# EAGLE board Spartan2Bone (EAGLE 8.0.1)
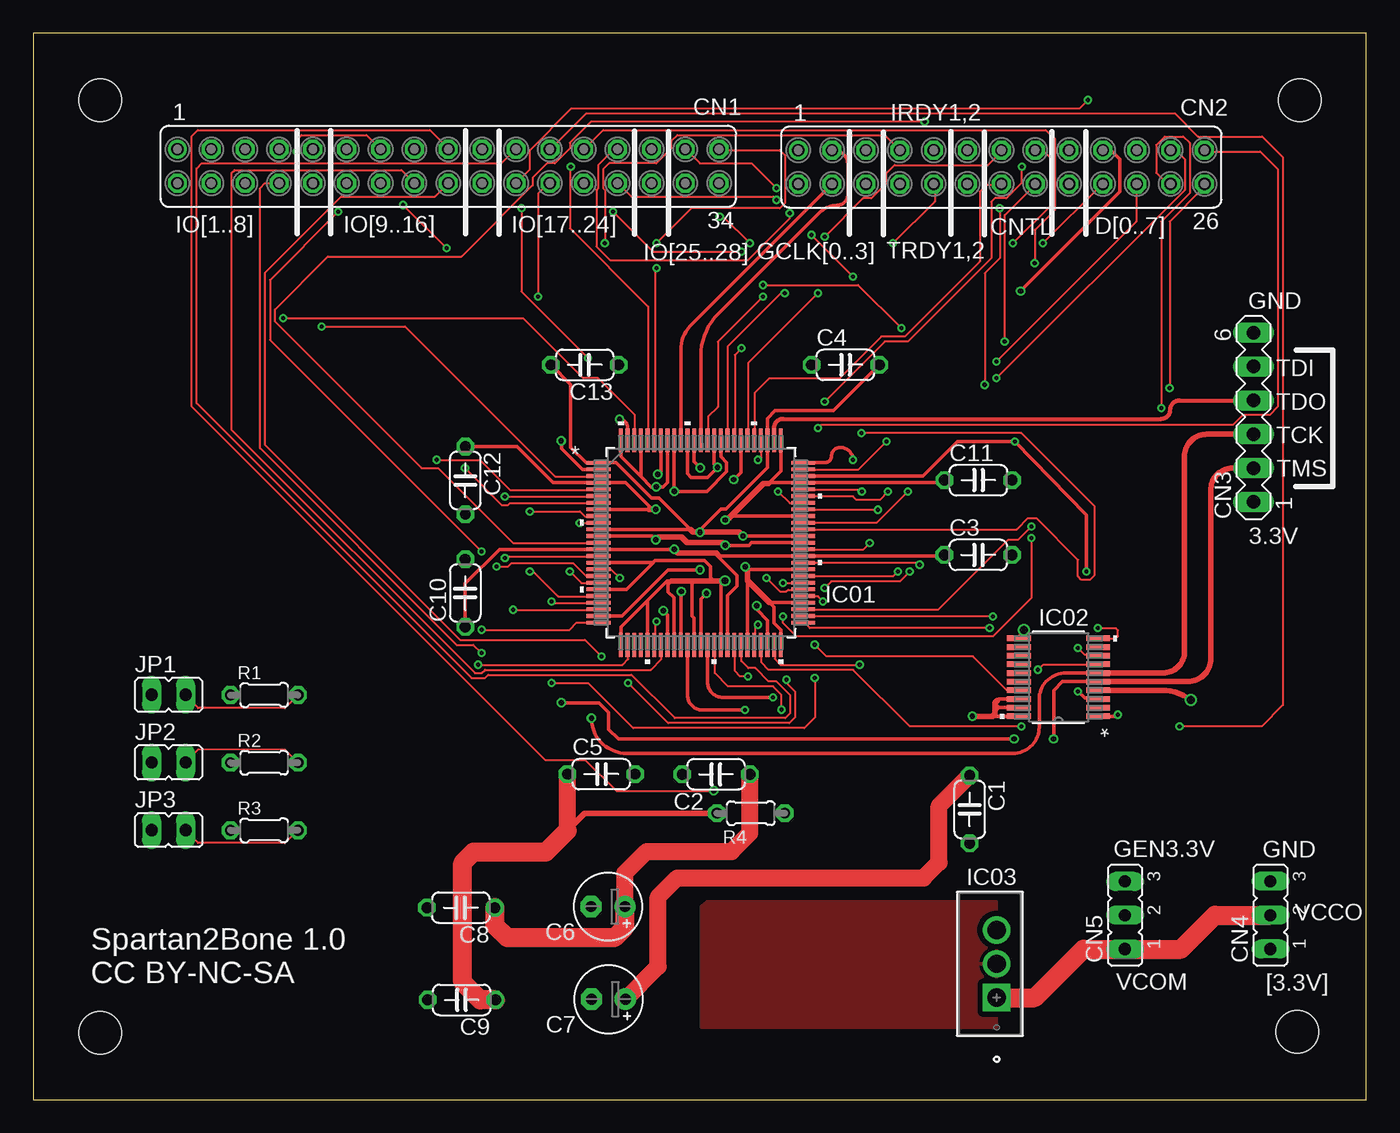
[diagram p0: board, top side]
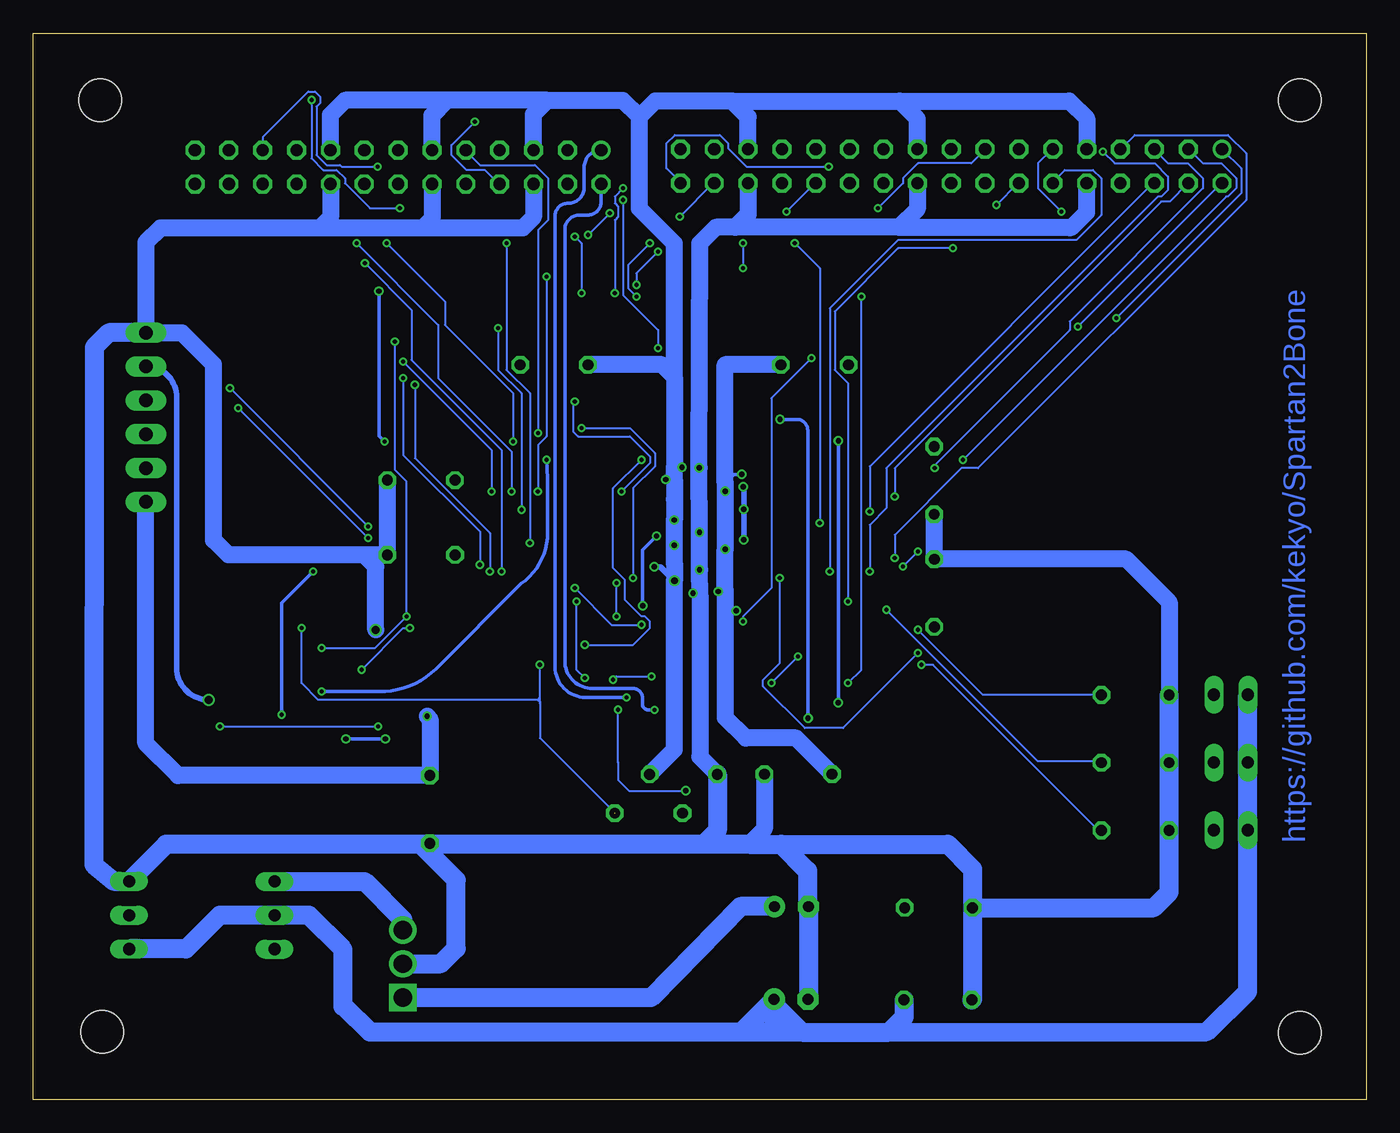
[diagram p1: board, bottom side, seen from below]

Size 100 x 80 mm. Coordinates in mm from the lower left corner, seen from the top.
Outline: 0,0 100,0 100,80 0,80 0,0
Copper layers (1*16): Top 0.035mm / dielectric 1.5mm / Bottom 0.035mm
Design rules "SeeedStudio_2layer_DRU_no_angle_20140221 *": minimum track width 6mil, minimum drill 12mil, track to track 8mil, track to pad 8mil, pad to pad 8mil, via to via 8mil, smd to smd 0mil, copper to edge 50mil, drill to drill 10mil, minimum pad ring 10mil, minimum via ring 6mil, stop-mask expansion 2mil, vias tented up to drill 100mil, thermal gap 10mil
Holes 3.2 mm at 5,75 95,75 5,5 94.85,5.08

## Footprints (pad centres in the part's own frame; a part is rotated, then mirrored left to right if it is on the bottom)
C050-024X044 = drill 0.813 octagon: 1 -2.54,0; 2 2.54,0
E2,5-5 = drill 0.813 pad 1.6: + -1.27,0 | drill 0.813 pad 1.6 octagon: - 1.27,0
FE17-2 = drill 0.914: 1 -20.32,1.27 | drill 0.914 octagon: 2 -20.32,-1.27; 3 -17.78,1.27; 4 -17.78,-1.27; 5 -15.24,1.27; 6 -15.24,-1.27; 7 -12.7,1.27; 8 -12.7,-1.27; 9 -10.16,1.27; 10 -10.16,-1.27; 11 -7.62,1.27; 12 -7.62,-1.27; 13 -5.08,1.27; 14 -5.08,-1.27; 15 -2.54,1.27; 16 -2.54,-1.27; 17 0,1.27; 18 0,-1.27; 19 2.54,1.27; 20 2.54,-1.27; 21 5.08,1.27; 22 5.08,-1.27; 23 7.62,1.27; 24 7.62,-1.27; 25 10.16,1.27; 26 10.16,-1.27; 27 12.7,1.27; 28 12.7,-1.27; 29 15.24,1.27; 30 15.24,-1.27; 31 17.78,1.27; 32 17.78,-1.27; 33 20.32,1.27; 34 20.32,-1.27
FE13-2 = drill 0.914: 1 -15.24,1.27 | drill 0.914 octagon: 2 -15.24,-1.27; 3 -12.7,1.27; 4 -12.7,-1.27; 5 -10.16,1.27; 6 -10.16,-1.27; 7 -7.62,1.27; 8 -7.62,-1.27; 9 -5.08,1.27; 10 -5.08,-1.27; 11 -2.54,1.27; 12 -2.54,-1.27; 13 0,1.27; 14 0,-1.27; 15 2.54,1.27; 16 2.54,-1.27; 17 5.08,1.27; 18 5.08,-1.27; 19 7.62,1.27; 20 7.62,-1.27; 21 10.16,1.27; 22 10.16,-1.27; 23 12.7,1.27; 24 12.7,-1.27; 25 15.24,1.27; 26 15.24,-1.27
MA06-1 = drill 1.016 long: 1 -6.35,0; 2 -3.81,0; 3 -1.27,0; 4 1.27,0; 5 3.81,0; 6 6.35,0
JP2 = drill 0.914 long: 1 -2.54,0; 2 0,0; 3 2.54,0
100-VQFP-M = smd 1.778 x 0.279: 1 -7.671,6; 2 -7.671,5.5; 3 -7.671,5; 4 -7.671,4.5; 5 -7.671,4; 6 -7.671,3.5; 7 -7.671,3; 8 -7.671,2.5; 9 -7.671,2; 10 -7.671,1.5; 11 -7.671,1; 12 -7.671,0.5; 13 -7.671,0; 14 -7.671,-0.5; 15 -7.671,-1; 16 -7.671,-1.5; 17 -7.671,-2; 18 -7.671,-2.5; 19 -7.671,-3; 20 -7.671,-3.5; 21 -7.671,-4; 22 -7.671,-4.5; 23 -7.671,-5; 24 -7.671,-5.5; 25 -7.671,-6; 51 7.671,-6; 52 7.671,-5.5; 53 7.671,-5; 54 7.671,-4.5; 55 7.671,-4; 56 7.671,-3.5; 57 7.671,-3; 58 7.671,-2.5; 59 7.671,-2; 60 7.671,-1.5; 61 7.671,-1; 62 7.671,-0.5; 63 7.671,0; 64 7.671,0.5; 65 7.671,1; 66 7.671,1.5; 67 7.671,2; 68 7.671,2.5; 69 7.671,3; 70 7.671,3.5; 71 7.671,4; 72 7.671,4.5; 73 7.671,5; 74 7.671,5.5; 75 7.671,6 | smd 0.279 x 1.778: 26 -6,-7.671; 27 -5.5,-7.671; 28 -5,-7.671; 29 -4.5,-7.671; 30 -4,-7.671; 31 -3.5,-7.671; 32 -3,-7.671; 33 -2.5,-7.671; 34 -2,-7.671; 35 -1.5,-7.671; 36 -1,-7.671; 37 -0.5,-7.671; 38 0,-7.671; 39 0.5,-7.671; 40 1,-7.671; 41 1.5,-7.671; 42 2,-7.671; 43 2.5,-7.671; 44 3,-7.671; 45 3.5,-7.671; 46 4,-7.671; 47 4.5,-7.671; 48 5,-7.671; 49 5.5,-7.671; 50 6,-7.671; 76 6,7.671; 77 5.5,7.671; 78 5,7.671; 79 4.5,7.671; 80 4,7.671; 81 3.5,7.671; 82 3,7.671; 83 2.5,7.671; 84 2,7.671; 85 1.5,7.671; 86 1,7.671; 87 0.5,7.671; 88 0,7.671; 89 -0.5,7.671; 90 -1,7.671; 91 -1.5,7.671; 92 -2,7.671; 93 -2.5,7.671; 94 -3,7.671; 95 -3.5,7.671; 96 -4,7.671; 97 -4.5,7.671; 98 -5,7.671; 99 -5.5,7.671; 100 -6,7.671
20-TSSOP-M = smd 1.778 x 0.406: 1 -2.972,2.926; 2 -2.972,2.276; 3 -2.972,1.626; 4 -2.972,0.975; 5 -2.972,0.325; 6 -2.972,-0.325; 7 -2.972,-0.975; 8 -2.972,-1.626; 9 -2.972,-2.276; 10 -2.972,-2.926; 11 2.972,-2.926; 12 2.972,-2.276; 13 2.972,-1.626; 14 2.972,-0.975; 15 2.972,-0.325; 16 2.972,0.325; 17 2.972,0.975; 18 2.972,1.626; 19 2.972,2.276; 20 2.972,2.926
T03B = drill 1.372 pad 1.88 square: 1 -5.08,-1.016 | drill 1.372 pad 1.88: 2 -2.54,-1.016; 3 0,-1.016
JP1 = drill 0.914 long: 1 0,-1.27; 2 0,1.27
0204/5 = drill 0.813 octagon: 1 -2.54,0; 2 2.54,0

## Placement (x,y rotation side)
C1  0.01uF  [C050-024X044]  70.25,21.77 270 top
C2  0.01uF  [C050-024X044]  51.22,24.4 180 top
C3  0.01uF  [C050-024X044]  70.89,40.86 0 top
C4  0.01uF  [C050-024X044]  60.93,55.13 0 top
C5  0.01uF  [C050-024X044]  42.61,24.42 0 top
C6  100uF  [E2,5-5]  43.12,14.48 180 top
C7  100uF  [E2,5-5]  43.15,7.53 180 top
C8  0.1uF  [C050-024X044]  32.08,14.39 180 top
C9  0.1uF  [C050-024X044]  32.13,7.48 180 top
C10  0.01uF  [C050-024X044]  32.4,38 90 top
C11  0.01uF  [C050-024X044]  70.9,46.47 0 top
C12  0.01uF  [C050-024X044]  32.41,46.45 270 top
C13  0.01uF  [C050-024X044]  41.37,55.13 180 top
CN1  IO[1..28]  [FE17-2]  31.13,70.03 0 top
CN2  GCK RDY CNT D[0..7]  [FE13-2]  72.63,69.97 0 top
CN3  JTAG  [MA06-1]  91.55,51.19 90 top
CN4  POWER  [JP2]  92.81,13.83 90 top
CN5  PCONF  [JP2]  81.9,13.83 90 top
IC01  XC2S30-5VQG100C100-VQFP-M  [100-VQFP-M]  50.08,41.78 0 top
IC02  XCF01SVOG20C20-TSSOP-M  [20-TSSOP-M]  76.92,31.68 180 top
IC03  LM2937ET-3.3/NOPB  [T03B]  71.26,12.72 90 top
JP1  MODE0  [JP1]  10.15,30.37 270 top
JP2  MODE1  [JP1]  10.15,25.29 270 top
JP3  MODE2  [JP1]  10.15,20.21 270 top
R1  4.7k  [0204/5]  17.32,30.35 0 top
R2  4.7k  [0204/5]  17.32,25.27 0 top
R3  4.7k  [0204/5]  17.32,20.19 0 top
R4  4.7k  [0204/5]  53.83,21.48 0 top

## Library data of the parts
C1-C13 R1-R4 = resistor
CN1 CN2 = con-lsta; OC_FARNELL: unknown; OC_NEWARK: unknown
CN3 = con-lstb; OC_FARNELL: unknown; OC_NEWARK: unknown
CN4 CN5 JP1-JP3 = jumper
IC01 = Spartan2Bone; MANUFACTURER_PART_NUMBER: XC2S305VQG100C; VENDOR: Xilinx Inc
IC02 = Spartan2Bone; MANUFACTURER_PART_NUMBER: XCF01SVOG20C; VENDOR: Xilinx Inc
IC03 = Spartan2Bone; MANUFACTURER_PART_NUMBER: lm2937et3_3nopb; VENDOR: National Semiconductor

## Nets
BUSY: CN2.15 IC01.74
CCLK: IC01.75 IC02.3
CS: CN2.14 IC01.80
D0: CN2.19 IC01.73 IC02.1
D1: CN2.20 IC01.70
D2: CN2.21 IC01.69
D3: CN2.22 IC01.66
D4: CN2.23 IC01.60
D5: CN2.24 IC01.57
D6: CN2.25 IC01.56
D7: CN2.26 IC01.53
DONE: IC01.49 IC02.10 R4.2
GND: C1.2 C2.2 C3.2 C4.2 C5.2 C6.- C7.- C8.2 C9.2 C10.2 C11.2 C12.2 C13.2 CN1.10 CN1.20 CN1.30 CN2.6 CN2.12 CN2.18 CN3.6 CN4.3 IC01.1 IC01.11 IC01.24 IC01.38 IC01.48 IC01.64 IC01.78 IC01.89 IC02.11 IC03.2 R1.1 R2.1 R3.1
I_GCK0: CN2.1 IC01.39
I_GCK1: CN2.2 IC01.36
I_GCK2: CN2.3 IC01.88
I_GCK3: CN2.4 IC01.91
INIT: CN2.16 IC01.52 IC02.8
IO1: CN1.1 IC01.98
IO2: CN1.2 IC01.3
IO3: CN1.3 IC01.5
IO4: CN1.4 IC01.6
IO5: CN1.5 IC01.7
IO6: CN1.6 IC01.9
IO7: CN1.7 IC01.15
IO8: CN1.8 IC01.17
IO9: CN1.11 IC01.18
IO10: CN1.12 IC01.19
IO11: CN1.13 IC01.21
IO12: CN1.14 IC01.22
IO13: CN1.15 IC01.31
IO14: CN1.16 IC01.32
IO15: CN1.17 IC01.40
IO16: CN1.18 IC01.43
IO17: CN1.21 IC01.44
IO18: CN1.22 IC01.46
IO19: CN1.23 IC01.47
IO20: CN1.24 IC01.55
IO21: CN1.25 IC01.58
IO22: CN1.26 IC01.68
IO23: CN1.27 IC01.71
IO24: CN1.28 IC01.83
IO25: CN1.31 IC01.84
IO26: CN1.32 IC01.87
IO27: CN1.33 IC01.95
IO28: CN1.34 IC01.96
IRDY: CN2.7 IC01.10
IRDY2: CN2.9 IC01.65
M0: IC01.25 JP1.2 R1.2
M1: IC01.23 JP2.2 R2.2
M2: IC01.27 JP3.2 R3.2
PROG: IC01.51 IC02.7
REG33: CN5.3 IC03.3
TCK: CN3.3 IC01.99 IC02.6
TDI: CN3.5 IC02.4
TDO: CN3.4 IC01.77
TDOTDI: IC01.79 IC02.17
TMS: CN3.2 IC01.2 IC02.5
TRDY: CN2.8 IC01.13
TRDY2: CN2.10 IC01.62
VCCINT: C1.1 C3.1 C5.1 C7.+ C9.1 C10.1 C13.1 CN3.1 CN4.1 CN5.2 IC01.14 IC01.33 IC01.35 IC01.42 IC01.61 IC01.85 IC01.92 IC01.94 IC02.18 IC02.19 IC02.20 JP1.1 JP2.1 JP3.1 R4.1
VCCO: C2.1 C4.1 C6.+ C8.1 C11.1 C12.1 CN1.9 CN1.19 CN1.29 CN2.5 CN2.11 CN2.17 CN4.2 CN5.1 IC01.4 IC01.8 IC01.12 IC01.16 IC01.20 IC01.26 IC01.30 IC01.34 IC01.37 IC01.41 IC01.45 IC01.50 IC01.54 IC01.59 IC01.63 IC01.67 IC01.72 IC01.76 IC01.82 IC01.86 IC01.90 IC01.93 IC01.97 IC01.100 IC03.1
WRITE: CN2.13 IC01.81

## Tracks (layer width: path | path; a pad name or v marks a point on that pad's centre or on a via)
BUSY  (via drill 0.3)
  Top 0.152: v64,49.38 61.88,47.25 57.88,47.25 IC01.74 | v73.5,64.25 76.25,67 76.25,70.71 75.73,71.24 CN2.15
  Bottom 0.152: v64,49.38 64,53 69.12,58.12 69.12,59.88 v73.5,64.25
CCLK  (via drill 0.3)
  Top 0.152: 79.4,30.12 79.88,30.12 IC02.3
  Top 0.254: IC01.75 59.37,47.78 arc90 59.89,48.31 arc-90 60.5,48.92 60.58,48.92 arc-90 v61.5,48 | v78.38,30.62 78.88,30.12 79.4,30.12
  Bottom 0.254: v78.38,30.62 78.37,30.63 73.61,30.63 arc-43 69.8,32.31 63.4,38.71 arc-55 61.42,42.52 61.42,45.92 arc-5 v61.5,48
CS
  Top 0.152: IC01.80 54.12,49.5 54.12,53.03 55.22,54.12 60.5,54.12 63.62,57.25 65.38,57.25 71,62.88 71,68.12 71.5,68.62 72.62,68.62 CN2.14
D0  (via drill 0.3, 0.4)
  Top 0.254: IC01.73 66.75,46.78 69.34,49.38 v73.65,49.38 79,43.88 v79,39.62 | v81.38,28.88 81.25,28.75 IC02.1 | 80.73,71.24 CN2.19 80.86,71.24 81.53,70.56 81.53,68.12 v74.07,60.66
  Bottom 0.254: v79,39.62 81.38,37.25 v81.38,28.88 | v73.65,49.38 74.07,49.79 v74.07,60.66
D1  (via drill 0.3)
  Top 0.152: v64.12,45.62 63.5,45 61.75,45 61.5,45.25 57.88,45.25 IC01.70 | v75.75,64.25 80.12,68.62 CN2.20
  Bottom 0.152: v64.12,45.62 64.12,48.62 69.62,54.12 69.62,58.12 v75.75,64.25
D2  (via drill 0.3)
  Top 0.152: v55.88,45.62 56.75,44.75 57.75,44.75 IC01.69 | v59.38,52.38 63.88,56.88 65.62,56.88 71.88,63.12 71.88,67.36 72.14,67.62 73,67.62 74.12,68.75 74.12,70 v74.17,70
  Bottom 0.152: v55.88,45.62 53.75,47.75 53.75,48.25 55.25,49.75 59.12,49.75 59.5,50.12 59.5,52.25 v59.38,52.38 | v74.17,70 76.88,70 77,70.12 78,70.12 78.75,70.88 78.75,74.5 78.5,74.75 78.5,75.25 78.88,75.62 79.38,75.62 82.75,72.25 82.75,71.25 CN2.21
D3  (via drill 0.3)
  Top 0.152: v72.25,55.38 82.75,65.88 82.75,68.62 CN2.22 | IC01.66 63.28,43.28 v65.62,45.62
  Bottom 0.152: v65.62,45.62 65.62,48.75 v72.25,55.38
D4  (via drill 0.3)
  Top 0.152: v66.5,40.12 66.38,40.25 57.88,40.25 IC01.60 | v72.25,54.12 86.38,68.25 86.38,70.56 85.7,71.24 CN2.23
  Bottom 0.152: v66.5,40.12 66.5,42.62 72.25,48.38 v72.25,54.12
D5  (via drill 0.3)
  Top 0.152: v56.25,38.75 57.75,38.75 IC01.57 | v56.25,36.25 56.25,35.75 57.25,34.75 72,34.75 74.88,37.62 v74.88,42.12 | v84.62,51.88 84.62,65.88 86.75,68 86.75,71.78 86.28,72.25 84.88,72.25 84.25,71.62 84.25,69.54 85.04,68.75 85.25,68.75 CN2.24
  Bottom 0.152: v56.25,36.25 v56.25,38.75 | v84.62,51.88 v74.88,42.12
D6  (via drill 0.3)
  Top 0.152: v55,39.12 56,38.12 56.5,38.12 56.62,38.25 57.75,38.25 IC01.56 | v58.88,50.38 59.12,50.62 90,50.62 90.75,51.38 92.75,51.38 93.38,52 93.38,69.8 92.05,71.12 | 92.05,71.12 87.88,71.12 CN2.25 | 92.05,71.12
  Bottom 0.152: v55,39.12 55,45.88 53.38,47.5 53.38,48.5 55.25,50.38 v58.88,50.38
D7  (via drill 0.3)
  Top 0.152: v74.88,43 73.88,42 73.12,42 67.88,36.75 57.88,36.75 IC01.53 | v85.25,53.38 85.25,65.88 87.75,68.38 87.75,68.62 CN2.26
  Bottom 0.152: v85.25,53.38 v74.88,43
DONE  (via drill 0.3)  (1 unrouted)
  Top 0.152: IC01.49 55.62,34 55.62,33.07 56.07,32.62 v62,32.62 | IC02.10 81.24,34.6 81.38,34.75 81.38,35.2 81.23,35.36 79.89,35.36 v79.88,35.38
  Bottom 0.152: 62,29.87 62,29.72 | 62,29.72 62,27.12 56.38,21.5 | 62,29.87 62,30 | 62,30 62,30.18 | 62,30.18 v62,32.62 | v79.88,35.38 79.88,31.25 78.62,30 62.18,30 | 62.18,30 62,30 | 62,30.18 62.18,30 | 62.18,30 62.13,30 62,29.87 | 62,29.72 62,29.82 62.18,30
GND  (via drill 0.4, 0.6)
  Top 0.254: IC01.24 44.17,36.28 47.63,39.74 v50.02,39.74 | IC01.38 50.08,37.57 v50.51,38 | v54.28,37.05 54.28,36.76 55.08,35.96 IC01.48 | IC01.64 | v53.24,42.28 IC01.64 | IC01.89 49.58,47.85 v50.04,47.39 | v50.02,42.57 50.05,42.75 51.59,44.29 51.97,44.29 55.08,47.4 IC01.78 55.08,51.11 55.66,51.69 60.03,51.69 C4.2 | C13.2 40.32,53.64 40.32,48.92 41.46,47.78 IC01.1 43.72,47.78 46.38,45.13 46.96,45.13 49.51,42.57 | IC01.11 49.3,42.78
  Top 0.406: 52.97,42.55 v53.24,42.28 52.95,42.57 v50.02,42.57 49.51,42.57 49.3,42.78 | IC02.11 74.31,34.96 v74.31,35.24
  Bottom 0.254: v50.51,38 50.13,38 50,37.87 | v53.24,42.28 54.28,41.24 v54.28,37.05
  Bottom 1.27: C2.2 50,25.72 50,37.87 v50.02,39.74 v50.02,42.57 v50.04,47.39 50,64.24 48.79,65.45 47.34,65.45 | 35.05,65.45 47.34,65.45 | 35.05,65.45 22.37,65.45 22.35,65.43 22.13,65.43 20.97,66.58 CN1.10 | CN1.30 46.37,66.42 47.34,65.45 | CN1.20 33.67,66.82 35.05,65.45 | CN2.18 77.71,66.19 78.5,65.4 | 78.5,65.4 90.48,65.4 91.55,64.32 CN3.6 88.85,57.54 86.47,55.15 86.47,41.97 85.36,40.86 75.18,40.86 | CN2.12 70.09,66.1 70.79,65.4 | 70.79,65.4 78.5,65.4 | CN2.6 62.47,66.22 63.29,65.4 70.79,65.4 | R1.1 14.78,37.32 18,40.54 C10.2 C12.2 | v74.31,35.24 74.31,39.99 75.18,40.86 | C1.2 70.25,18.75 70.4,18.6 | C5.2 45.15,20.31 46.32,19.14 | C11.2 73.44,40.87 C3.2 75.18,40.86
  Bottom 1.422: 43.88,19.14 41.91,17.17 41.91,14.54 C6.- 41.85,7.56 C7.- | 70.95,19.14 90.03,19.14 CN4.3 93.98,16.37 95.46,17.61 95.43,56.44 94.33,57.54 CN3.6 | 49.71,19.14 70.95,19.14 | 49.71,19.14 46.32,19.14 43.88,19.14 | IC03.2 69.43,10.18 68.28,11.33 68.28,16.48 70.4,18.6 70.95,19.14 | 43.88,19.14 31.4,19.14 29.54,17.29 C8.2 | R1.1 R2.1 R3.1 14.78,15.55 15.94,14.39 C8.2 | C2.2 48.68,20.18 49.71,19.14 | C8.2 29.54,7.53 C9.2
  pour Top (isolate 0.406): 50.56,14.82 72.24,14.82 72.24,5.4 50.12,5.4 50.12,14.5
I_GCK0  (via drill 0.3)
  Top 0.254: v55.48,30.17 51.74,30.17 arc-90 50.58,31.33 IC01.39
  Bottom 0.254: CN2.1 CN2.1 arc-90 58.67,69.96 58.67,68.44 arc91 59.88,67.25 arc-94 60.85,66.25 60.85,32.47 arc-90 58.55,30.17 v55.48,30.17
I_GCK1  (via drill 0.3)
  Top 0.254: IC01.36 49.08,30.35 arc90 50.2,29.22 v53.4,29.22
  Bottom 0.254: v53.4,29.22 53.85,29.22 arc90 54.3,29.67 54.3,30.12 arc-90 55.02,30.84 58.05,30.84 arc90 60.12,32.91 60.12,65.33 arc92 58.9,66.37 58.42,66.37 arc-90 57.39,67.4 CN2.2
I_GCK2
  Top 0.254: CN2.3 60.03,71.24 arc-90 61.11,70.16 61.11,68.08 arc-98 60.28,67.09 arc44 58.99,66.54 51.11,58.66 arc40 50.08,55.79 IC01.88
I_GCK3
  Top 0.254: IC01.91 48.58,56.25 arc-52 49.6,58.35 59.93,68.68 CN2.4
INIT  (via drill 0.3)
  Top 0.152: v72,36.25 57.88,36.25 IC01.52 | v78.38,33.88 78.88,33.38 79.88,33.38 IC02.8 | v72.88,56.88 72.88,66.38 75.12,68.62 CN2.16
  Bottom 0.152: v78.38,33.88 74.38,33.88 v72,36.25 72,46.38 72.88,47.25 v72.88,56.88
IO1  (via drill 0.3)
  Top 0.152: v18.75,58.62 36.75,58.62 41.25,54.12 42.37,54.12 45.12,51.36 45.12,49.5 IC01.98
  Bottom 0.152: v18.75,58.62 9.38,68 9.38,69.88 10.75,71.25 CN1.1
IO2  (via drill 0.3)
  Top 0.152: v21.62,58 27.88,58 39.12,46.75 42.38,46.75 IC01.3
  Bottom 0.152: v21.62,58 10.88,68.75 CN1.2
IO3  (via drill 0.3)
  Top 0.152: v30.25,48 33.5,48 35.75,45.75 42.38,45.75 IC01.5
  Bottom 0.152: v30.25,48 10.5,67.75 10.38,67.75 9.75,68.38 9.75,69.12 10.88,70.25 12.25,70.25 13.25,71.25 CN1.3
IO4  (via drill 0.3)
  Top 0.152: v35.38,45.25 42.38,45.25 IC01.6
  Bottom 0.152: v35.38,45.25 35.38,47.38 15.38,67.38 14.75,67.38 13.38,68.75 CN1.4
IO5  (via drill 0.3)
  Top 0.152: v32.38,47.38 35.12,44.62 35.62,44.62 35.75,44.75 42.38,44.75 IC01.7
  Bottom 0.152: v32.38,47.38 32.38,47.62 22.25,57.75 22.25,58.38 12.25,68.38 12.25,69.12 13.38,70.25 14.88,70.25 15.88,71.25 CN1.5
IO6  (via drill 0.3)
  Top 0.152: v37.25,44.12 41,44.12 41.38,43.75 42.38,43.75 IC01.9
  Bottom 0.152: v37.25,44.12 37.25,47.5 16,68.75 CN1.6
IO7  (via drill 0.3)
  Top 0.152: v35.38,40.62 35.5,40.75 42.38,40.75 IC01.15
  Bottom 0.152: v35.38,40.62 35.38,42.38 30.38,47.38 29.12,47.38 9,67.5 9,71 10.38,72.38 17.38,72.38 18.38,71.38 CN1.7
IO8  (via drill 0.3)
  Top 0.152: v44,39.12 43.38,39.75 42.5,39.75 IC01.17 | v33.62,33.5 33,34.12 31.75,34.12 17,48.88 17,68.38 17.37,68.75 18.38,68.75 CN1.8
  Bottom 0.152: v44,39.12 44,32.75 45.25,31.5 45.25,31 42.12,27.88 39.25,27.88 v33.62,33.5
IO9  (via drill 0.3)
  Top 0.152: v34.75,40 35.62,40 35.88,40.25 40.5,40.25 41.5,39.25 42.38,39.25 IC01.18 | v33.62,41.12 17.75,57 17.75,61.5 v22.88,66.62
  Bottom 0.152: v33.62,41.12 v34.75,40 | v22.88,66.62 24.62,68.38 24.62,70.25 23.62,71.25 CN1.11
IO10  (via drill 0.3)
  Top 0.152: v40.25,39.62 41.12,38.75 42.38,38.75 IC01.19
  Bottom 0.152: v40.25,39.62 40.25,59.38 35.12,64.5 21.75,64.5 19.88,66.38 19.88,69.12 20.5,69.75 22.62,69.75 23.5,68.88 CN1.12
IO11  (via drill 0.3)
  Top 0.152: v37.25,39.62 37.5,39.62 39.38,37.75 42.38,37.75 IC01.21 | CN1.13 26,71.38 25,72.38 20.12,72.38 19.75,72.01 v19.75,71.12
  Bottom 0.152: v37.25,39.62 37.25,43.12 36,44.38 36,47.38 15.62,67.75 15.38,67.75 14.88,68.25 14.88,69.25 15.88,70.25 18.88,70.25 v19.75,71.12
IO12  (via drill 0.3)
  Top 0.152: v38.88,37.38 39,37.25 42.38,37.25 IC01.22 | v27.75,67.12 v31,63.88
  Bottom 0.152: v38.88,37.38 38.88,53.75 39.88,54.75 39.88,59.12 35.12,63.88 v31,63.88 | v27.75,67.12 26.12,68.75 CN1.14
IO13  (via drill 0.3)
  Top 0.152: v46.75,35.88 46.62,35.88 46.62,34.12 IC01.31 | v41.62,55.62 36.62,60.62 v36.62,66.88
  Bottom 0.152: v46.75,35.88 46.75,36.25 44.62,38.38 44.62,52.62 v41.62,55.62 | v36.62,66.88 34.75,68.75 34.75,69.12 33.62,70.25 29.62,70.25 28.62,71.25 CN1.15
IO14
  Top 0.152: IC01.32 47.12,34 47.12,33.05 46.33,32.25 33.88,32.25 33.62,32 33.12,32 14.88,50.25 14.88,69.54 15.09,69.75 27.62,69.75 28.5,68.88 CN1.16
IO15  (via drill 0.3, 0.4)
  Top 0.152: v56.12,29.25 56.12,30.38 55.5,31 52.12,31 51.12,32 51.12,34 IC01.40 | CN1.17 31.12,71.38 29.75,72.75 12.34,72.75 11.88,72.28 11.88,52 38.38,25.5 41.4,25.5 43.74,23.16 v51.05,23.16
  Bottom 0.152: 56.12,25.25 56.12,25.3 | 56.12,25.3 v56.12,29.25 | 56.12,25.3 56.12,23.97 55.32,23.16 v51.05,23.16
IO16  (via drill 0.3)
  Top 0.152: v53.62,31.75 53.03,31.75 52.62,32.16 52.62,34 IC01.43 | v56.5,31.5 56.5,31.25 57.12,30.62 57.12,28.65 56.72,28.25 47.62,28.25 v44.62,31.25 | v42.62,33.25 41.38,34.5 32,34.5 17.38,49.12 17.38,62.03 23.1,67.75 30.12,67.75 CN1.18
  Bottom 0.152: v53.62,31.75 56.25,31.75 v56.5,31.5 | v42.62,33.25 v44.62,31.25
IO17
  Top 0.152: IC01.44 53.12,34 53.12,32.9 53.65,32.38 54.17,32.38 55.17,31.38 55.75,31.38 56.75,30.38 56.75,28.96 56.42,28.62 48.12,28.62 44.88,31.88 34.12,31.88 33.88,31.62 32.88,31.62 12.25,52.25 12.25,69.85 12.65,70.25 35.12,70.25 36.12,71.25 CN1.21
IO18  (via drill 0.3)
  Top 0.152: v54.38,35.62 54.12,35.62 54.12,34.12 IC01.46 | v59.38,38.38 59.88,38.88 65,38.88 v65.75,39.62 | v71.38,53.62 71.38,62 72.5,63.12 v72.5,66.88 | v79.12,75 78.5,74.38 40.38,74.38 37.25,71.25 37.25,69.8 CN1.22
  Bottom 0.152: v54.38,35.62 56.62,35.62 v59.38,38.38 | v65.75,39.62 65.75,42.5 71.38,48.12 v71.38,53.62 | v72.5,66.88 74.75,66.88 76.62,68.75 76.62,69.12 77.25,69.75 78.25,69.75 79.12,70.62 v79.12,75
IO19  (via drill 0.3)
  Top 0.152: v74.14,28 65.75,28 61.5,32.25 55.17,32.25 54.62,32.79 54.62,34 IC01.47 | CN1.23 38.88,71.38 41.5,74 85.62,74 87.38,72.25 92.2,72.25 93.75,70.7 93.75,29.59 92.16,28 v86,28
  Bottom 0.152: v86,28 v74.14,28
IO20  (via drill 0.3)
  Top 0.152: v59.25,37.38 58.88,37.75 57.88,37.75 IC01.55 | v58.62,31.62 58.62,28.65 57.85,27.88 45,27.88 41.62,31.25 v38.88,31.25 | v37.88,60.25 37.88,67.97 38.66,68.76 CN1.24
  Bottom 0.152: v59.25,37.38 59.25,32.25 v58.62,31.62 | v38.88,31.25 37.88,32.25 v37.88,60.25
IO21  (via drill 0.3)
  Top 0.152: v64.88,39.62 64.5,39.25 57.88,39.25 IC01.58 | v75.12,62.75 75.12,65.25 76.62,66.75 76.62,72.08 75.96,72.75 42.75,72.75 41.38,71.38 CN1.25
  Bottom 0.152: v64.88,39.62 64.88,48.75 71.62,55.5 71.62,59.25 v75.12,62.75
IO22  (via drill 0.3)
  Top 0.152: v63.38,44.25 57.88,44.25 IC01.68 | v65.12,57.88 61.88,61.12 v54.75,61.12 | v53.12,63.62 46.5,63.62 v43.5,66.62
  Bottom 0.152: v63.38,44.25 63.38,53 65.12,54.75 v65.12,57.88 | v54.75,61.12 54.75,62 v53.12,63.62 | v43.5,66.62 41.38,68.75 CN1.26
IO23  (via drill 0.3)
  Top 0.152: v62.15,45.62 61.88,45.75 57.88,45.75 IC01.71 | v58.38,64.88 v61.5,61.75 | v56.75,66.5 56.75,66.12 53.62,63 43.25,63 42.25,64 42.25,68.25 42.38,68.38 42.38,70.1 43.57,71.3 CN1.27
  Bottom 0.152: v61.5,61.75 61.5,49.75 62.12,49.12 62.12,47.75 62.13,47.55 62.13,45.65 v62.15,45.62 | v56.75,66.5 v58.38,64.88
IO24  (via drill 0.3)
  Top 0.152: v55.75,67.5 55.5,67.75 44.88,67.75 43.88,68.75 CN1.28 | IC01.83 52.62,49.5 52.62,55.88 v53.12,56.38
  Bottom 0.152: v53.12,56.38 53.12,57.75 55.75,60.38 v55.75,67.5
IO25  (via drill 0.3)
  Top 0.152: v55.75,68.38 53.88,70.25 50,70.25 49,71.25 CN1.31 | IC01.84 52.12,49.5 52.12,56.55 56.08,60.5 v56.38,60.5
  Bottom 0.152: v56.38,60.5 56.38,66 56.12,66.25 56.12,67 56.38,67.25 56.38,67.75 v55.75,68.38
IO26  (via drill 0.3)
  Top 0.152: v53.75,64.25 51.75,66.25 v51.5,66.25 | IC01.87 50.62,49.5 50.62,51.23 51.36,51.97 51.36,56.86 v54.75,60.25
  Bottom 0.152: v54.75,60.25 55.38,60.88 55.38,62.62 v53.75,64.25 | v51.5,66.25 49,68.75 CN1.32
IO27  (via drill 0.3)
  Top 0.152: v46.75,62.38 46.62,62.38 46.62,49.5 IC01.95 | v46.75,64.25 49.38,66.88 56,66.88 56.38,67.25 56.38,70.87 55.99,71.25 51.5,71.25 CN1.33
  Bottom 0.152: v46.75,64.25 v46.75,62.38
IO28  (via drill 0.3)
  Top 0.152: v40.32,70 40.25,70 40.25,65.38 46.12,59.5 46.12,49.5 IC01.96
  Bottom 0.152: v40.32,70 46.5,70 47.88,71.38 47.88,71.75 48.5,72.38 51.88,72.38 52.5,71.75 52.5,69.88 51.5,68.88 CN1.34
IRDY  (via drill 0.3)
  Top 0.152: v41,43.25 42.38,43.25 IC01.10 | v42.88,64.25 42.88,68.25 42.75,68.38 42.75,69.8 43.2,70.25 46.75,70.25 47.88,71.38 47.88,71.93 48.32,72.38 63.88,72.38 CN2.7
  Bottom 0.152: v41,43.25 41,62.38 v42.88,64.25
IRDY2  (via drill 0.3)
  Top 0.152: IC01.65 73.78,42.78 74.62,43.62 75.25,43.62 78.38,40.5 78.38,39.26 78.64,39 79.25,39 79.62,39.38 79.62,44.5 74.13,50 v62.12,50
  Bottom 0.152: v62.12,50 62.12,65.25 61.38,66 61.38,69.12 62.38,70.12 66.5,70.12 67.5,71.12 CN2.9
M0  (via drill 0.3)
  Top 0.152: v33.62,35.25 40.23,35.25 40.77,35.78 IC01.25 42.38,35.75 | JP1.2 11.49,30.25 12.37,29.38 18.88,29.38 19.75,30.25 R1.2
  Bottom 0.152: v33.62,35.25 28.75,30.38 19.88,30.38 R1.2
M1  (via drill 0.3)
  Top 0.152: v36,36.75 42.38,36.75 IC01.23 | JP2.2 11.49,25.38 12.37,26.25 18.88,26.25 19.75,25.38 R2.2
  Bottom 0.152: v36,36.75 24.62,25.38 19.88,25.38 R2.2
M2  (via drill 0.3)
  Top 0.152: IC01.27 44.62,34 44.62,33.05 44.2,32.62 v33.38,32.62 | JP3.2 11.49,20.12 12.37,19.25 18.88,19.25 19.75,20.12 R3.2
  Bottom 0.152: v33.38,32.62 32.5,32.62 20.12,20.25 19.88,20.25 R3.2
PROG  (via drill 0.3)
  Top 0.152: v71.75,35.38 58.25,35.38 57.88,35.75 IC01.51 | v75.38,32.25 75.75,32.62 79.88,32.62 IC02.7
  Bottom 0.152: v71.75,35.38 72.25,35.38 v75.38,32.25
REG33
  Bottom 1.422: CN5.3 75.15,16.37 72.28,13.5 IC03.3
TCK  (via drill 0.4)
  Top 0.254: IC01.99 44.58,50.43 arc90 v43.98,51.03 | v41.88,28.61 arc90 44.51,25.98 73.5,25.98 arc90 75.46,27.93 75.46,30.02 arc-90 77.45,32 IC02.6
  Top 0.406: CN3.3 88.03,49.92 arc90 86.37,48.25 86.37,33.62 arc-90 84.75,32 IC02.6 arc-90 79.93,32.04
  Bottom 0.254: v43.98,51.03 42.71,51.03 arc90 41.9,50.22 41.9,28.63 arc-90 v41.88,28.61
TDI  (via drill 0.6)
  Top 0.406: IC02.4 84.64,30.7 arc-35 v86.86,30
  Bottom 0.406: CN3.5 arc90 89.25,52.69 89.25,32.39 arc-90 v86.86,30
TDO
  Top 0.305: IC01.77 55.58,50.41 arc-90 56.25,51.07 84.62,51.07 arc90 85.3,51.75 arc-90 86,52.46 CN3.4
TDOTDI  (via drill 0.3)
  Top 0.152: v54.38,48 54.62,48 54.62,49.38 IC01.79 | v58.62,34.12 59.5,33.25 70.5,33.25 73,30.75 73.88,30.75 IC02.17
  Bottom 0.152: v54.38,48 56.5,45.88 56.5,39.88 55.62,39 55.62,37.5 54.38,36.25 54.12,36.25 53.75,35.88 53.75,35.38 55,34.12 v58.62,34.12
TMS  (via drill 0.4)
  Top 0.254: IC01.2 41.22,47.28 39.65,48.85 39.65,49.42 v39.6,49.44 | v39.61,29.77 42.43,29.77 43.15,29.05 43.15,27.78 43.89,27.04 73.59,27.04 v73.6,27.05 | v76.55,27.05 76.55,30.68 77.22,31.35 IC02.5
  Top 0.406: CN3.2 89.98,47.38 arc90 88.34,45.73 88.34,33.07 arc-90 86.63,31.36 79.9,31.36 arc90 IC02.5
  Bottom 0.254: v39.6,49.44 v39.6,29.78 v39.61,29.77 | v73.6,27.05 v76.55,27.05
TRDY  (via drill 0.3)
  Top 0.152: IC01.13 42.38,41.75 36,41.75 30.38,47.38 29.12,47.38 18.12,58.38 18.12,59.28 22.09,63.25 32.12,63.25 37.47,68.6 37.47,69.17 38.56,70.25 39.12,70.25 40.25,71.38 40.25,71.78 41.84,73.38 v66.88,73.38
  Bottom 0.152: v66.88,73.38 68.62,71.62 68.62,70.88 67.5,69.75 66.12,69.75 65.12,68.75 CN2.8
TRDY2  (via drill 0.3)
  Top 0.152: v62.75,41.75 62.25,41.25 57.88,41.25 IC01.62 | v64.5,64.25 67.62,67.38 67.62,68.62 CN2.10
  Bottom 0.152: v62.75,41.75 62.75,53 64.5,54.75 v64.5,64.25
VCCINT  (via drill 0.4)
  Top 0.254: v48.09,41.28 IC01.14 34.98,41.28 32.4,38.71 C10.1 | IC01.33 47.58,36.37 v47.26,36.69 | IC01.35 48.58,38.18 v48.61,38.12 | IC01.42 52.08,37.82 52.8,38.54 52.8,39.3 52.41,39.7 51.25,40.86 51.25,41 | IC01.94 47.08,47.13 v46.85,46.91 | IC01.92 v48.08,45.63 v48.09,45.63 50.54,45.63 52.02,47.12 52.02,47.8 51.58,48.25 IC01.85 | 51.46,40.78 IC01.61 68.28,40.78 C3.1 | 71.94,28.75 IC02.20 | v70.45,28.75 | IC02.18 72.44,30.05 72.33,29.93 | IC02.19 72.32,29.4
  Top 0.406: v48.09,41.28 48.38,41 51.25,41 51.46,40.78 | v70.45,28.75 71.94,28.75 72.13,28.94 72.13,29.21 | 72.32,29.4 72.13,29.21 | 40.07,20.19 41.37,21.48 R4.1 | 72.13,29.21 72.13,29.74 72.33,29.93
  Top 1.27: C7.+ 46.88,9.99 46.88,15.19 48.31,16.62 66.79,16.62 67.96,17.79 67.96,22.02 C1.1 | 40.07,20.19 C5.1
  Top 1.422: C9.1 33.53,7.48 32.21,8.8 32.21,17.75 33.03,18.57 38.45,18.57 40.07,20.19
  Bottom 0.254: v47.26,36.69 47.94,36.69 48.09,36.83 | v48.61,38.12 48.09,38.21 | v46.85,46.91 47.45,46.91 48.09,46.27
  Bottom 0.406: v70.45,28.75 70.45,24.51
  Bottom 1.27: 48.09,55.13 | 48.09,55.13 48.09,46.27 v48.09,45.63 v48.09,41.28 48.09,38.21 48.09,36.83 48.09,28.67 46.53,27.11 42.77,27.11 C5.1 | C13.1 48.09,55.13 | CN3.1 91.55,26.73 89.13,24.31 C1.1 70.25,28.54 v70.45,28.75
  Bottom 1.422: 46.9,5.05 C7.+ | 46.9,5.05 74.74,5.05 76.67,6.97 76.76,6.97 76.76,11.26 79.33,13.83 CN5.2 86.01,13.83 88.55,11.29 CN4.1 | JP1.1 JP2.1 JP3.1 8.89,8.11 11.97,5.08 35.8,5.05 | 44.58,5.05 46.9,5.05 | 42.33,5.05 44.58,5.05 | 42.33,5.05 35.8,5.05 | 35.8,5.05 34.67,6.18 C9.1 | C7.+ 44.42,5.21 44.58,5.05 | C7.+ 44.42,7.15 42.33,5.05
VCCO  (via drill 0.4, 0.5)
  Top 0.254: IC01.16 46.48,40.28 | IC01.20 44.5,38.28 46.48,40.26 46.48,40.28 | IC01.26 44.08,35.45 46.23,37.59 | IC01.34 48.08,37.65 47.64,38.09 47.64,38.65 47.9,38.92 47.55,38.92 46.23,37.59 | IC01.37 49.58,36.13 49.43,36.28 49.43,38.68 49.66,38.92 | IC01.41 51.58,38.6 v51.9,38.92 | 51.03,38.92 50.79,39.15 50.79,40.01 50.34,40.46 46.66,40.46 46.48,40.28 | IC01.45 53.58,38.01 53.58,38.95 53.58,38.94 | v53.41,39.97 53.58,39.8 | IC01.63 53.87,41.78 53.67,41.59 v51.91,41.59 | IC01.50 56.08,35.22 55.55,35.75 55.55,36.97 55.24,37.28 IC01.54 | IC01.59 53.6,39.78 | IC01.8 46.06,44.28 46.19,44.28 46.19,44.52 | v46.69,41.99 46.4,42.28 IC01.12 | IC01.100 44.08,48.24 45.58,46.74 | 45.58,46.74 46.36,45.97 v46.74,45.97 47.24,45.97 47.58,46.31 IC01.93 | IC01.97 45.58,46.74 | IC01.86 51.08,47.68 v51.33,47.43 50.58,46.68 49.35,46.68 49.08,46.95 IC01.90 | IC01.82 53.08,47.06 v52.54,46.52 | C12.1 36.27,48.99 38.98,46.28 IC01.4 44.42,46.28 46.19,44.52 | 55.22,46.28 56.08,47.15 IC01.76 | 55.22,46.28 IC01.72 68.17,46.28 C11.1 | 55.22,46.28 55.14,46.21 | 46.19,44.52 46.43,44.28 v46.7,44.28 | IC01.67 52.34,43.78 | 46.23,37.59 46.08,37.45 IC01.30
  Top 0.406: 47.9,38.92 49.66,38.92 51.03,38.92 v51.9,38.92 | 53.58,38.95 53.58,39.8 | 55.24,37.28 54.7,37.82 53.58,38.94 | 53.6,39.78 v53.41,39.97 | v46.7,44.28 46.19,44.28 | v51.91,41.59 51.7,41.8 49.05,41.8 48.65,42.2 46.9,42.2 v46.69,41.99 | 55.14,46.21 54.77,46.21 54.45,45.89 52.34,43.78 52.05,43.48 v51.9,43.48
  Top 1.27: C6.+ 44.39,16.99 46.02,18.62 52.39,18.62 53.76,19.99 C2.1
  Top 1.422: CN4.2 88.65,13.83 86.11,11.29 CN5.1 78.79,11.29 75.14,7.64 IC03.1 | C6.+ 44.39,12.92 43.6,12.13 35.57,12.13 34.62,13.08 C8.1
  Bottom 0.254: 46.69,44.27 v46.7,44.28 | v46.74,45.97 46.69,45.93 | v51.33,47.43 51.9,47.43 | 51.9,47.43 | 51.92,45.01 51.9,45.02 | v52.54,46.52 | v52.54,46.52 51.9,46.52
  Bottom 0.406: v53.41,39.97 52.95,39.97 v51.9,38.92 | v46.69,41.99 46.69,44.27 46.69,45.93
  Bottom 1.27: 54.54,73.73 54.54,66.86 51.9,64.22 51.9,54.19 | 54.54,73.73 55.78,74.98 61.41,74.98 | 68.95,74.98 76.62,74.98 77.71,73.88 CN2.17 | 61.41,74.98 68.95,74.98 | 51.9,54.19 51.9,47.43 51.9,46.52 51.9,45.02 v51.9,43.48 v51.91,41.59 51.9,40.25 v51.9,38.92 51.9,26.26 C2.1 | CN2.11 70.09,73.84 68.95,74.98 | CN2.5 62.47,73.91 61.41,74.98 | 54.54,73.73 53.35,74.92 47.57,74.92 | 47.57,74.92 35,74.92 | 35,74.92 22.27,74.92 20.97,73.61 CN1.9 | CN1.19 33.67,73.59 35,74.92 | CN1.29 46.37,73.72 47.57,74.92 | 51.9,54.19 52.83,55.13 C4.1
  Bottom 1.422: C6.+ 46.96,14.48 53.66,7.64 IC03.1
WRITE  (via drill 0.3)
  Top 0.152: v59.38,64.75 62.25,67.62 62.88,67.62 64,68.75 64,69.51 64.62,70.12 71.62,70.12 72.62,71.12 CN2.13 | IC01.81 53.62,49.5 53.62,55.25 v58.88,60.5
  Bottom 0.152: v58.88,60.5 58.88,64.25 v59.38,64.75

## Text on the board
Bottom: https://github.com/kekyo/Spartan2Bone
tNames: IRDY1,2 | IO[1..8] | IO[9..16] | IO[17..24] | CNTL | D[0..7] | IO[25..28] | GCLK[0..3] | TRDY1,2 | GND | TDI | TDO | TCK | TMS | 3.3V | GEN3.3V | GND | VCCO | Spartan2Bone 1.0 / CC BY-NC-SA | VCOM | [3.3V]